# Altium PCB ECG PCB.PcbDoc
Units mil, origin at the board's own origin, x right, y up, seen from the top; angles counter-clockwise.
Board outline 6000 x 4000 mil, 2 copper layers (Top Layer, Bottom Layer); 14 components, 16 nets, 55 pads, 0 vias.
Unrouted connection lines stored in the file: 30.
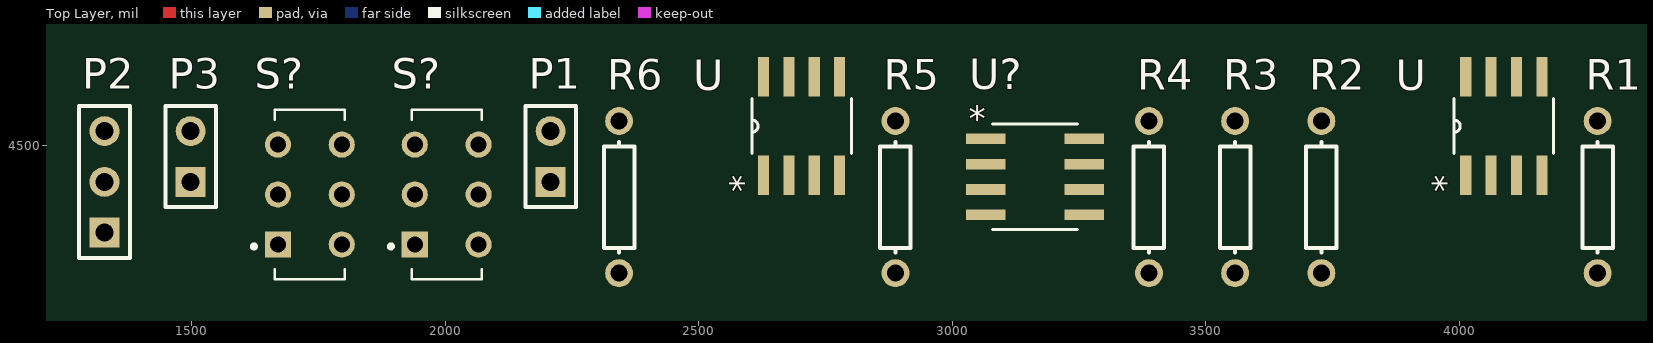
[diagram p0: Top Layer view]
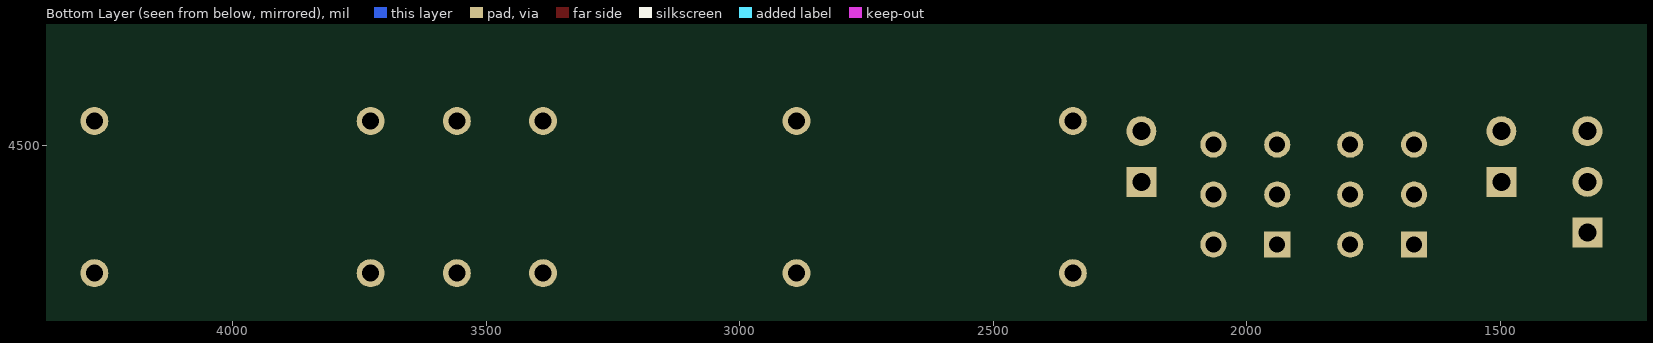
[diagram p1: Bottom Layer view, seen from below]

## Layer stack, top to bottom
Top Solder: solder mask 0.4, Solder Resist, Dk 3.5
Top Layer: signal copper 1.4
Dielectric 1: dielectric 12.6, FR-4, Dk 4.8
Bottom Layer: signal copper 1.4
Bottom Solder: solder mask 0.4, Solder Resist, Dk 3.5

## Board outline
1000,1000 7000,1000 7000,5000 1000,5000

## Design rules (kind name [scope] priority, off if disabled: settings)
Clearance [All] p1: gap=10 ignorepadtopadclearanceinfootprint=FALSE except(0: Arc-Hole Track-Hole SMDPad-Hole THPad-Hole Via-Hole Fill-Hole Poly-Hole Region-Hole Text-Hole)
PolygonConnect [All] p1: connectstyle=Relief reliefconductorwidth=10 reliefentries=4 polygonreliefangle="90 Angle" airgapwidth=10
RoomDefinition "ECG circuit" [InComponentClass('ECG circuit')] p1: confinementstyle=ConfineIn formatcopy=TRUE lockcomponents=FALSE outline 1267.99,4208.43 4347.99,4208.43 4347.99,4688.43 1267.99,4688.43
RoutingVias [All] p1: holewidth=28 width=50 viastyle="Through Hole" minholewidth=28 minwidth=50 maxholewidth=28 maxwidth=50
SolderMaskExpansion [All] p1: expansion=4 istentingtop=FALSE
Width [All] p1: maxlimit=10 minlimit=10 preferedwidth=10
30 further rules are at their usual default settings.

## Classes and differential pairs
component class "ECG circuit": P1 P2 P3 R1 R2 R3 R4 R5 R6 S? U U?

## Components (designator, comment, footprint, x,y, rotation, side; value= is the part's Value field where it differs from the comment)
P1 "Header 2" HDR1X2 2207.99,4428.43 r90 top
P2 "Header 3" HDR1X3 1327.99,4328.43 r90 top
P3 "Header 2" HDR1X2 1497.99,4428.43 r90 top
R1 "Res1" AXIAL-0.3 4272.99,4398.43 r90 top value=1K
R2 "Res1" AXIAL-0.3 3727.99,4398.43 r90 top value=1K
R3 "Res1" AXIAL-0.3 3557.99,4398.43 r90 top value=1K (schematic designator R4)
R4 "Res1" AXIAL-0.3 3387.99,4398.43 r90 top value=1K (schematic designator R3)
R5 "Res1" AXIAL-0.3 2887.99,4398.43 r90 top value=1K
R6 "Res1" AXIAL-0.3 2342.99,4398.43 r90 top value=1K
S? "EG1271A" SW_EG1271A 2002.99,4403.43 r90 top
S? "EG1271A" SW_EG1271A 1732.99,4403.43 r90 top
U "AD8065ARZ" SOIC127P600X175-8N 2702.99,4538.43 r90 top (schematic designator U2)
U "AD8065ARZ" SOIC127P600X175-8N 4087.99,4538.43 r90 top (schematic designator U1)
U? "LT1920CS8#PBF" SO-8_S 3162.99,4438.43 r0 top

## Footprints (in the part's own frame and the unit in brackets; to place one, negate y for a bottom-side part, rotate by r counter-clockwise, add the part's x,y. Pads: shape width x height; smd on the part's side, far side on the other; paste and mask are expansions set on the pad)
AXIAL-0.3 [mm] "Axial Device, Thru-Hole; 2 Leads; 0.3 in Pin Spacing"
  round 1.4 hole 0.85: 1(-3.81,0) 2(3.81,0)
  silkscreen extent -2.77,-0.76 2.77,0.76
HDR1X2 [mm] "Connector; Header; 2 Position"
  rect 1.5x1.5 hole 0.9: 1(0,0)
  round 1.5 hole 0.9: 2(2.54,0)
  silkscreen extent -1.27,-1.27 3.81,1.27
HDR1X3 [mm] "Connector; Header; 3 Position"
  rect 1.5x1.5 hole 0.9: 1(0,0)
  round 1.5 hole 0.9: 2(2.54,0) 3(5.08,0)
  silkscreen extent -1.27,-1.27 6.35,1.27
SO-8_S [mil]
  rect 78x21 smd: 1(-97,75) 2(-97,25) 3(-97,-25) 4(-97,-75) 5(97,-75) 6(97,-25) 7(97,25) 8(97,75)
  silkscreen extent -84,-104 84,104, body extent -96,-118 96,118, height 59
SOIC127P600X175-8N [mil]
  rect 78x22 smd: 1(-97,75) 2(-97,25) 3(-97,-25) 4(-97,-75) 5(97,-75) 6(97,-25) 7(97,25) 8(97,75)
  silkscreen extent -54,-98 54,98
SW_EG1271A [mm]
  rect 1.308x1.308 hole 0.8: 1(-2.5,1.6)
  round 1.308 hole 0.8: 2(0,1.6) 3(2.5,1.6) 4(-2.5,-1.6) 5(0,-1.6) 6(2.5,-1.6)
  silkscreen extent -4.25,-1.75 4.25,2.9, body extent -4.25,-1.75 4.25,1.75, height 7.9

## Part data
P1 P3: "Header, 2-Pin", LatestRevisionDate=17-Jul-2002, LatestRevisionNote="Re-released for DXP Platform.", Publisher="Altium Limited"
P2: "Header, 3-Pin", LatestRevisionDate=17-Jul-2002, LatestRevisionNote="Re-released for DXP Platform.", Publisher="Altium Limited"
R1 R2 R3 R4 R5 R6: library part CRF0805-FZ-R002ELF, "Resistor", LatestRevisionDate=17-Jul-2002, LatestRevisionNote="Re-released for DXP Platform.", PackageDescription="Axial Device, Thru-Hole; 2 Leads; 0.3 in Pin Spacing", PackageReference=AXIAL-0.3, Published=8-Jun-2000, Publisher="Altium Limited"
S? S?: "Slide Switch SPDT Through Hole", Package=None, Availability=Warning, Check_prices=https://www.snapeda.com/parts/EG1271A/E-Switch/view-part/304406/?ref=eda, MF=E-Switch, MP=EG1271A, Price=None, Purchase-URL=https://pricing.snapeda.com/search/part/EG1271A/?ref=eda, SnapEDA_Link=https://www.snapeda.com/parts/EG1271A/E-Switch/view-part/304406/?ref=snap
U U: "Voltage Feedback Amplifier 1 Circuit Rail-to-Rail 8-SOIC", Package="SOIC-8 Analog Devices", Availability=Good, BuyPart=https://www.snapeda.com/parts/AD8065ARZ/Analog%20Devices%20Inc./view-part/48278/?ref=eda, DigiKey-Purchase-URL=https://snapeda.com/shop?store=DigiKey&id=48278, MF="Analog Devices", Mouser-Purchase-URL=https://snapeda.com/shop?store=Mouser&id=48278, MP=AD8065ARZ, Price=None, SnapEDA_Link=https://www.snapeda.com/parts/AD8065ARZ/Analog%20Devices%20Inc./view-part/48278/?ref=snap
U?: "LT1920 - Single Resistor Gain Programmable, Precision Instrumentation Amplifier", Package="SO-8 Linear Technology", Availability="In Stock", Check_prices=https://www.snapeda.com/parts/LT1920CS8%23PBF/Analog+Devices/view-part/?ref=eda, MF="Analog Devices", MP=LT1920CS8#PBF, Price=None, Purchase-URL=https://pricing.snapeda.com/search/part/LT1920CS8#PBF/?ref=eda, SnapEDA_Link=https://www.snapeda.com/parts/LT1920CS8%23PBF/Analog+Devices/view-part/?ref=snap

## Nets (pads, with @x,y where several pads share a name; then routed paths per layer and width w, separated by ;. In a path a pad name is that pad's centre, name@x,y a point inside that pad or via, vN(x,y) a via of type N, cw(c..) or ccw(c..) an arc to the next point about the centre after c; other vN are vias at no path point)
"1st Res (1)": R3.2 S?.2@1670,4403.43 U.2@4062.99,4441.43
"1st Res (2)": R6.2 S?.5@1795.98,4403.43 U.2@2677.99,4441.43
"2nd Res": S?.2@1940,4403.43 U?.1
"10 amp (1)": R1.1 S?.1@1670,4305
"10 amp (2)": R5.1 S?.4@1795.98,4305
"10 amp (2nd)": R2.1 S?.1@1940,4305
"100 amp (2nd)": R4.1 S?.3@1940,4501.85
"Buffer (1)": R1.2 S?.3@1670,4501.85 U.6@4112.99,4635.43 U?.2
"Buffer (2)": R5.2 S?.6@1795.98,4501.85 U.6@2727.99,4635.43 U?.3
GND: P2.2 P3.2 R3.1 R6.1 U?.5
NetR2_2: R2.2 R4.2 U?.8
Vin1: P1.1 U.3@4112.99,4441.43
Vin2: P1.2 U.3@2727.99,4441.43
Vout: P3.1 U?.6
Vs+: P2.1 U.7 U?.7
Vs-: P2.3 U.4 U?.4
pads on no net: S?.4@2065.98,4305 S?.5@2065.98,4403.43 S?.6@2065.98,4501.85 U.1 U.5 U.8

## Text inside footprints (layer, text, board x,y; h text height)
U: Top Overlay "*" at 3995.99,4408.43 h50 r90; Mechanical 13 "*" at 3995.99,4408.43 h50 r90
U: Top Overlay "*" at 2610.99,4408.43 h50 r90; Mechanical 13 "*" at 2610.99,4408.43 h50 r90
U?: Top Overlay "*" at 3032.99,4529.43 h50; Mechanical 13 "*" at 3076.99,4484.43 h50